# Altium PCB MOD-SH-RFDET-01.PcbDoc
Units mil, origin at the board's own origin, x right, y up, seen from the top; angles counter-clockwise.
Board outline 2204.72 x 393.7 mil, 2 copper layers (Top Layer, Bottom Layer), stack 61.855 mil thick; 41 components, 31 nets, 118 pads, 40 vias.
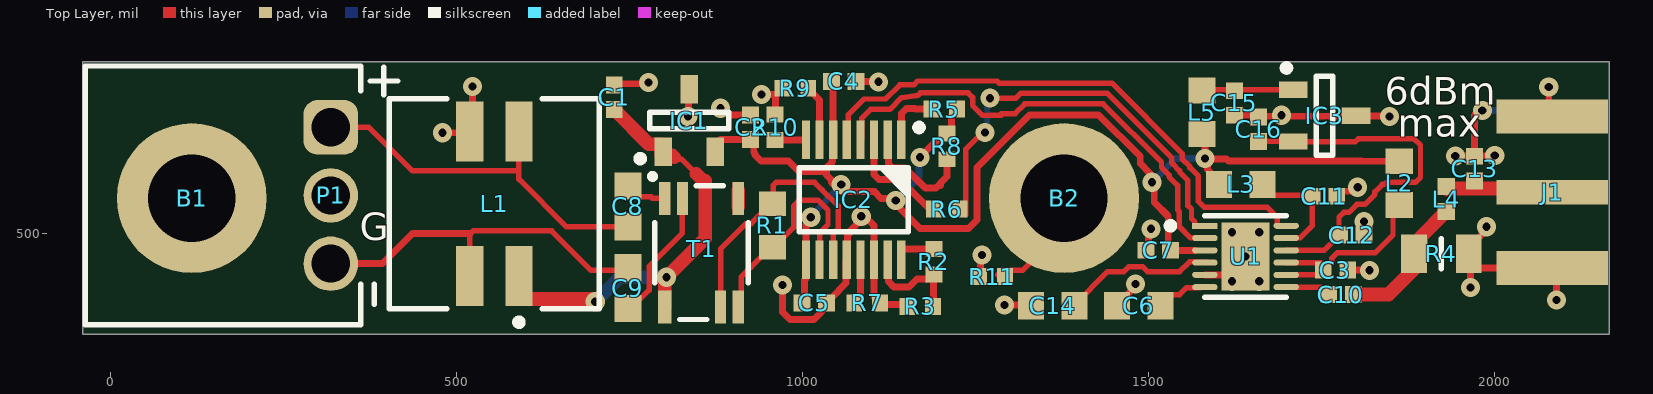
[diagram p0: Top Layer view]
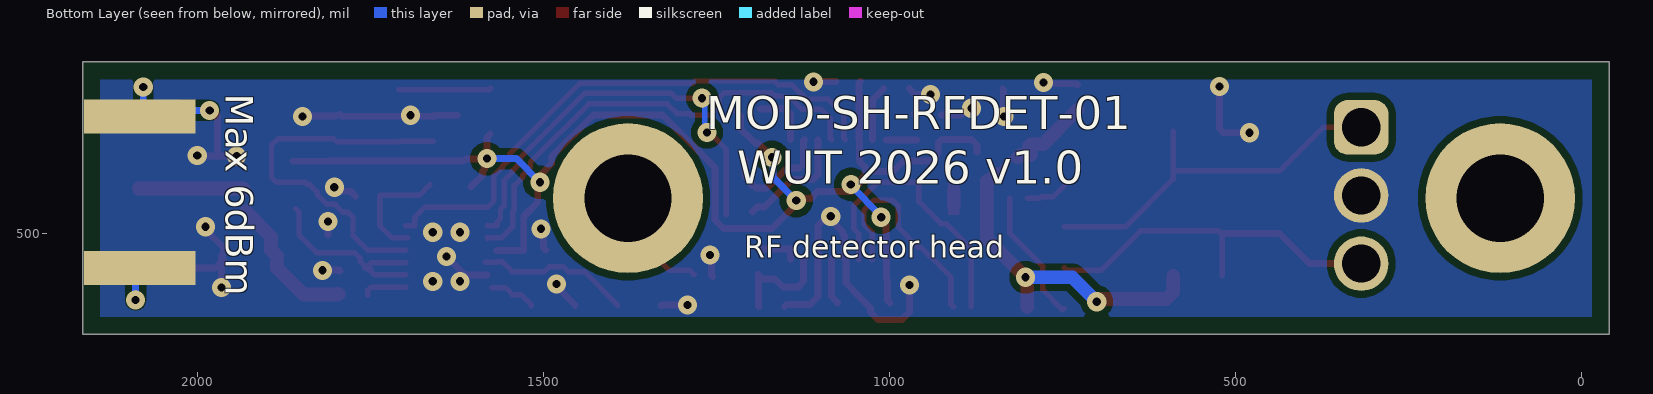
[diagram p1: Bottom Layer view, seen from below]
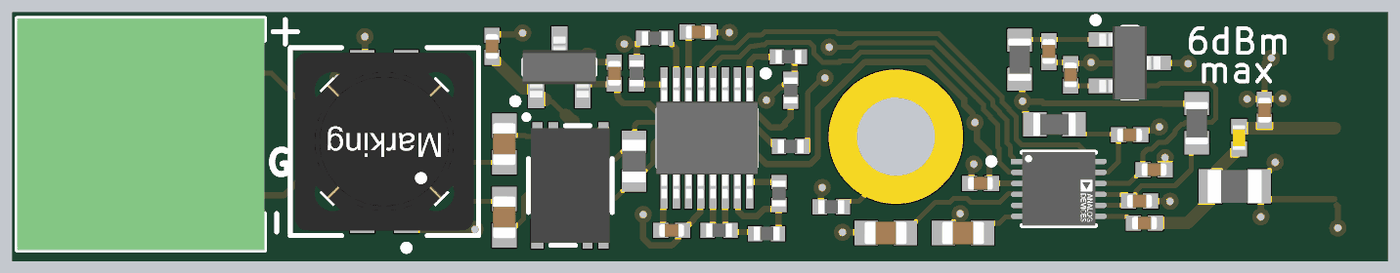
[diagram p2: 3D render of the assembled board from above, using the file's embedded part models]

## Layer stack, top to bottom
Top Solder: solder mask 0.4, Solder Resist, Dk 3.5
Top Layer: signal copper 1.4
Dielectric 2: core 59.0551, FR-4 High Tg, Dk 4.2
Bottom Layer: signal copper 1.4
Bottom Solder: solder mask 0.4, Solder Resist, Dk 3.5

## Board outline
-39.37,354.33 -39.37,748.03 2165.35,748.03 2165.35,354.33

## Design rules (kind name [scope] priority, off if disabled: settings)
AcuteAngle [All] p1: minimum=4.50000000000000E+0001 checktracksonly=FALSE
AssemblyTestPointUsage [All] p1: valid=2
BoardOutlineClearance BoardOutlineClearance_MountingHoles [OnCopper and InComponentClass('Mounting Holes')] p1: gap=39.37 ignorepadtopadclearanceinfootprint=FALSE
BoardOutlineClearance BoardOutlineClearance_Poly [OnCopper and IsPoly] p2: gap=25 ignorepadtopadclearanceinfootprint=FALSE
BoardOutlineClearance [OnCopper and Not InComponentClass('Logo') and not InComponentClass('FiducialMark') and not InRegion(1000,500,4000,800) and not InPoly] p3: gap=15 ignorepadtopadclearanceinfootprint=FALSE
Clearance Clearance_Keepouts [((IsTrack Or IsArc) And Not InPoly) And IsFree and IsKeepOut vs ((IsTrack Or IsArc) And Not InPoly) And IsFree and IsKeepOut] p1: gap=0 ignorepadtopadclearanceinfootprint=FALSE
Clearance Clearance_Poly [InPolygon] p2: gap=10 ignorepadtopadclearanceinfootprint=TRUE
Clearance Clearance_FiducialMark [IsKeepOut and InComponentClass('FiducialMark') vs IsPad and InComponentClass('FiducialMark')] p3: gap=0 ignorepadtopadclearanceinfootprint=TRUE
Clearance [All vs Not InComponentClass('FiducialMark')] p4: gap=5.8 ignorepadtopadclearanceinfootprint=FALSE
ComponentClearance ComponentClearance_MountingHoles_FiducialMarks [InComponentClass('Mounting Holes') vs InComponentClass('FiducialMark')] p1: gap=50 collisioncheckmode=3 verticalgap=10 showdistances=FALSE
ComponentClearance ComponentClearance_Shunt [InComponentClass('Header') vs InComponentClass('Shunt')] p2: gap=0 collisioncheckmode=3 verticalgap=0 showdistances=FALSE
ComponentClearance ComponentClearance_Logo [InComponentClass('Logo')] p3: gap=30 collisioncheckmode=3 verticalgap=10 showdistances=FALSE
ComponentClearance ComponentClearance_ScrewToNut [(HasFootprint('NY PMS 440 0025 PH')) vs (HasFootprint('Keystone_1902C'))] p4: gap=5 collisioncheckmode=3 verticalgap=10 showdistances=FALSE
ComponentClearance ComponentClearance_MountingHoles [InComponentClass('Mounting Holes')] p5: gap=100 collisioncheckmode=3 verticalgap=100000 showdistances=FALSE
ComponentClearance ComponentClearance_SmallPassives [HasFootprint('0201*') or HasFootprint('0402*') or HasFootprint('0508') or HasFootprint('0603*') or HasFootprint('0612') or HasFootprint('0805*') or HasFootprint('0815*') or HasFootprint('0830*') or HasFootprint('1206*') or HasFootprint('1210*') or HasFootprint('1808*') or HasFootprint('1812*') or HasFootprint('1825*') or HasFootprint('2010*') or HasFootprint('2220*') or HasFootprint('2225*') or HasFootprint('2512*') or HasFootprint('2728*') or HasFootprint('3518*') vs HasFootprint('0201*') or HasFootprint('0402*') or HasFootprint('0508') or HasFootprint('0603*') or HasFootprint('0612') or HasFootprint('0805*') or HasFootprint('0815*') or HasFootprint('0830*') or HasFootprint('1206*') or HasFootprint('1210*') or HasFootprint('1808*') or HasFootprint('1812*') or HasFootprint('1825*') or HasFootprint('2010*') or HasFootprint('2220*') or HasFootprint('2225*') or HasFootprint('2512*') or HasFootprint('2728*') or HasFootprint('3518*')] p6: gap=14.96 collisioncheckmode=3 verticalgap=10 showdistances=FALSE
ComponentClearance ComponentClearance_THtoSMT [IsThruComponent vs IsSMTComponent] p7: gap=15 collisioncheckmode=3 verticalgap=30 showdistances=FALSE
ComponentClearance ComponentClearance_THtoTH [IsThruComponent vs IsThruComponent] p8: gap=10 collisioncheckmode=3 verticalgap=30 showdistances=FALSE
ComponentClearance [All] p9: gap=-100 collisioncheckmode=3 verticalgap=10 showdistances=FALSE
DiffPairsRouting [All] p1: maxlimit=100 minlimit=10 mostfreqgap=10 toplayer_minwidth=15 toplayer_maxwidth=15 toplayer_prefwidth=15 bottomlayer_minwidth=15 bottomlayer_maxwidth=15 bottomlayer_prefwidth=15 maxuncoupledlength=1000
FabricationTestPointUsage TestPointUsage [All] p1: valid=2 allowmultiple=FALSE
FabricationTestpoint Testpoint [All] p1: side=3 testpointundercomponent=TRUE minsize=40 maxsize=100 preferedsize=60 minholesize=0 maxholesize=40 preferedholesize=32 testpointgrid=1 allowsidetop=TRUE allowsidebottom=TRUE usegrid=TRUE gridtolerance=0.01
FanoutControl Fanout_LCC [IsLCC] p1: bgadir=Out bgaviamode=Centered fanoutstyle=Auto fanoutdirection=Alternating viagrid=1 // Fanout_LCC (Default Rule)
FanoutControl Fanout_BGA [IsBGA] p2: bgadir=Out bgaviamode=Centered fanoutstyle=Auto fanoutdirection=Alternating viagrid=1 // Fanout_BGA (Default Rule)
FanoutControl Fanout_Default [All] p4: bgadir=Out bgaviamode=Centered fanoutstyle=Auto fanoutdirection=Alternating viagrid=1 // Fanout_Default (Default Rule)
FanoutControl Fanout_Small [(CompPinCount < 5)] p5: bgadir=Out bgaviamode=Centered fanoutstyle=Auto fanoutdirection=OutThenIn viagrid=1 // Fanout_Small (Default Rule)
HoleSize [All] p1: absolutevalues=TRUE maxlimit=251 minlimit=7.87 maxpercent=80.000 minpercent=20.000
MinimumAnnularRing MinimumAnnularRing_ThermalPadVias [IsVia and InAnyComponent] p1: minimumring=5
MinimumAnnularRing [All] p2: minimumring=5
MinimumSolderMaskSliver MinimumSolderMaskSliver_Logo [InComponentClass('Logo') vs InComponentClass('Logo')] p1: minsoldermaskwidth=0.7
MinimumSolderMaskSliver [All] p2: minsoldermaskwidth=3
PlaneConnect [All] p1: planeconnectstyle=Direct reliefexpansion=10 reliefentries=4 reliefconductorwidth=10 reliefairgap=10
PolygonConnect [All] p1: connectstyle=Direct reliefconductorwidth=10 reliefentries=4 polygonreliefangle="90 Angle" airgapwidth=10
RoutingVias [All] p1: holewidth=8 width=11.81 viastyle="Through Hole" minholewidth=11.81 minwidth=27.56 maxholewidth=40 maxwidth=65
SilkToBoardRegionClearance [Not ((IsComment or IsDesignator) And (Hide <> 'False')) and not InRegion(1000,500,4000,800)] p1:
SilkToSilkClearance SilkToSilkClearance_Pb-FreeLogo [(HasFootprint('Pb-Free_Overlay_Medium') OR HasFootprint('Pb-Free_Overlay_Small')) vs (HasFootprint('Pb-Free_Overlay_Medium') OR HasFootprint('Pb-Free_Overlay_Small'))] p1: silktosilkclearance=0
SilkToSilkClearance [All] p2: silktosilkclearance=3.94
SilkToSolderMaskClearance SilkToComponentPadClearance [(IsPad or IsFill or IsRegion) and InAnycomponent] p1: minsilkscreentomaskgap=3 clearancetoexposedcopper=TRUE
SilkToSolderMaskClearance "Silk to Solder Mask Opening" [All] p2: minsilkscreentomaskgap=3 clearancetoexposedcopper=FALSE
SolderMaskExpansion [All] p1: expansion=1.97 istentingtop=FALSE
SupplyNets "Schematic Supply Nets_2" [InNet('P3V3')] p1: voltage=0.000
SupplyNets "Schematic Supply Nets_12" [InNet('P5V0')] p2: voltage=0.000
SupplyNets "Schematic Supply Nets_11" [InNet('GND')] p3: voltage=0.000
UnRoutedNet [All] p1: checkbadconnections=TRUE
Width [All] p1: maxlimit=100 minlimit=7.87 preferedwidth=10 checkconnectedcopper=TRUE
14 further rules are at their usual default settings.

## Components (designator, comment, footprint, x,y, rotation, side; value= is the part's Value field where it differs from the comment)
B1 "Plated Hole" MTG320_550 118.11,551.18 r0 top
B2 "Plated Hole" MTG320_550 1377.95,551.18 r0 top locked
C1 "1uF" CAPC1005X55N 728.35,696.85 r270 top
C2 "1uF" CAPC1005X55N 925.2,653.54 r270 top
C3 "1uF" CAPC1005X55N 1769.97,447.36 r180 top
C4 "1uF" CAPC1005X55N 1060,720 r180 top
C5 "1uF" CAPC1005X55N 1017.28,400 r180 top
C6 "10nF" CAPC1608X87N 1486,396 r180 top
C7 "1uF" CAPC1005X55N 1514,476 r0 top
C8 "10uF" CAPC1608X80N 748.03,539.37 r90 top
C9 "10uF" CAPC1608X80N 748.03,421.26 r270 top
C10 "1nF" CAPC1005X55N 1777.84,411.93 r0 top
C11 "1uF" CAPC1005X55N 1754,554 r180 top
C12 "1uF" CAPC1005X55N 1793.28,498 r180 top
C13 "1.8pF" CAPC1005X55N 1971,594 r270 top
C14 "10nF" CAPC1608X87N 1361.5,396 r180 top
C15 "1uF" CAPC1005X55N 1624,688.72 r90 top
C16 "1uF" CAPC1005X55N 1659,651 r270 top
IC1 "AP7313-33SAG-7" SOT95P240X130-3N 836.61,663.39 r90 top
IC2 "LTC6820HMS" SOP50P490X110-16N 1074,549 r270 top
IC3 "REF3318AIDBZT" SOT95P237X112-3N 1754.28,670.4 r0 top
J1 "60312202114508" 60312202114508 2383.59,559.75 r90 top
L1 "100µH, 0.3A" WE-DD_7332 555.12,543.31 r180 top
L2 "220R@100MHz" INDC1608X95N 1862,573 r270 top
L3 "220R@100MHz" INDC1608X95N 1633,571 r0 top
L4 "1.5nH" IND_MURATA_LQP15MN_02 1930,549.89 r90 top
L5 "220R@100MHz" INDC1608X95N 1577,675.5 r90 top
P1 "691382010003" 691382010003 163.39,555.12 r270 top
R1 "120" RESC1608X55N 956.69,511.81 r270 top
R2 "2K87" RESC1005X40N 1190,459.5 r270 top
R3 "1k2" RESC1005X40N 1170,395 r180 top
R4 "68R1" RESC2012X60N 1923,471 r180 top
R5 "0" RESC1005X40N 1205,680 r0 top
R6 "0" RESC1005X40N 1208.66,535.43 r0 top
R7 "0" RESC1005X40N 1093.5,400 r180 top
R8 "1k2" RESC1005X40N 1208.66,625.98 r90 top
R9 "0" RESC1005X40N 990,710 r0 top
R10 "0" RESC1005X40N 960.63,653.54 r270 top
R11 "0" RESC1005X40N 1274,438 r180 top
T1 "74930030" 74930030 854.33,472.44 r270 top
U1 "LTC5587IDD#TRPBF" FP-DD-12-05-08-1725-IPC_A 1640.05,467.05 r0 top

## Footprints (in the part's own frame and the unit in brackets; to place one, negate y for a bottom-side part, rotate by r counter-clockwise, add the part's x,y. Pads: shape width x height; smd on the part's side, far side on the other; paste and mask are expansions set on the pad)
74930030 [mm] "Super Tiny Signal Transformer, body 4.7x3.22mm"
  rect 1.2x0.41 smd: 1(-1.99,-1.35) 2(-1.99,-0.7) 6(1.99,0.7) 7(1.99,1.35)
  rect 0.6x0.41 smd: 3(-2.29,1.35) 4(-1.69,1.35)
  rect 1.2x0.5 smd: 5(1.99,-1.35)
  Top Layer region: -1.39,1.555 -2.59,1.555 -2.59,1.145 -2.59,1.145 -1.39,1.145
  silkscreen extent -2.9,-1.9 2.45,1.71, body extent -2.35,-1.61 2.35,1.61, height 2.83
691382010003 [mm] "Horizontal PCB Header, pitch 2.5mm, 03p"
  rrect50% 2x2 hole 1.4: 1(-2.5,3.95)
  round 2 hole 1.4: 2(0,3.95) 3(2.5,3.95)
  silkscreen extent -4.75,-5.05 4.75,5.05, body extent -4.75,-5.05 4.75,5.05, height 8.15
60312202114508 [mm] "SMA PCB End Launch Jack Round  Post for 1.1mm PCB"
  rect 0.9x4.1 smd: 1(0,7.635)
  rect 1.25x4.1 smd: 2(-2.775,7.635) 3(2.775,7.635)
  rect 1.25x4.1 smd far side: 4(-2.775,7.635) 5(2.775,7.635)
  body extent -3.17,-3.93 3.17,9.4, height 3.57
CAPC1005X55N [mm] "Capacitor, Non-Polarized, Chip; 1.00mm L X 0.50mm W X 0.70mm H, IPC Medium Density"
  rect 0.62x0.62 smd: 1(-0.45,0) 2(0.45,0)
  body extent -0.52,-0.27 0.53,0.28, height 0.55
CAPC1608X80N [mm] "Chip Capacitor, Body 1.6x0.8mm IPC Medium Density"
  rect 1x1 smd: 1(-0.75,0) 2(0.75,0)
  body extent -0.87,-0.47 0.88,0.48, height 0.8
CAPC1608X87N [mm] "Chip Capacitor, Body 1.6x0.8mm IPC Medium Density"
  rect 0.95x1 smd: 1(-0.8,0) 2(0.8,0)
  body extent -0.87,-0.47 0.88,0.48, height 0.87
FP-DD-12-05-08-1725-IPC_A [mm]
  rect 0.931x0.222 smd paste+0 mask+0: 1(-1.491,1.125)
  rrect100% 0.931x0.222 smd paste+0 mask+0: 2(-1.491,0.675) 3(-1.491,0.225) 4(-1.491,-0.225) 5(-1.491,-0.675) 6(-1.491,-1.125) 7(1.491,-1.125) 8(1.491,-0.675) 9(1.491,-0.225) 10(1.491,0.225) 11(1.491,0.675) 12(1.491,1.125)
  rect 1.75x2.48 smd paste-1000 mask+0: 13(0,0)
  silkscreen extent -2.88,-1.5 1.5,1.5, body extent -2.46,-2 2.46,2, height 0.25
IND_MURATA_LQP15MN_02 [mm] "SMT inductor 0402, Body Width 0.50mm Body Lenght 1.00mm Height 0.45mm"
  rect 0.62x0.64 smd: 1(-0.46,0) 2(0.46,0)
  body extent -0.5,-0.25 0.5,0.25, height 0.45
INDC1608X95N [mm] "Chip Inductor, 2-Leads, EIA 0603, Metric 1608, Body 1.6x0.8mm, IPC Medium Density"
  rect 0.95x1 smd: 1(-0.8,0) 2(0.8,0)
  body extent -0.87,-0.47 0.88,0.48, height 0.95
MTG320_550 [mm] "Plated Through Hole: Hole Dia.=3.2mm Pad Dia.=5.5mm"
  round 5.5 hole 3.2: 1(0,0)
RESC1005X40N [mm] "Chip Resistor, EIA 0402, Metric 1005, Body 1.0x0.5mm, IPC Medium Density"
  rect 0.58x0.62 smd: 1(-0.47,0) 2(0.47,0)
  body extent -0.52,-0.27 0.53,0.28, height 0.4
RESC1608X55N [mm] "Chip Resistor, EIA 0603, Metric 1608, Body 1.6x0.8mm, IPC Medium Density"
  rect 0.9x1 smd: 1(-0.8,0) 2(0.8,0)
  body extent -0.87,-0.47 0.88,0.48, height 0.55
RESC2012X60N [mm] "Chip Resistor, EIA 0805, Metric 2012, Body 2.0x1.2mm, IPC Medium Density"
  rect 0.95x1.4 smd: 1(-1,0) 2(1,0)
  silkscreen extent 0,-0.55 0,0.55, body extent -1.1,-0.67 1.1,0.68, height 0.6
SOP50P490X110-16N [mm] "SOP, 0.50mm Pitch; 16 Pin, 3.00mm W X 4.039mm L X 1.10mm H Body, IPC Medium Density"
  rect 1.4x0.3 smd: 1(-2.2,1.75) 2(-2.2,1.25) 3(-2.2,0.75) 4(-2.2,0.25) 5(-2.2,-0.25) 6(-2.2,-0.75) 7(-2.2,-1.25) 8(-2.2,-1.75) 9(2.2,-1.75) 10(2.2,-1.25) 11(2.2,-0.75) 12(2.2,-0.25) 13(2.2,0.25) 14(2.2,0.75) 15(2.2,1.25) 16(2.2,1.75)
  silkscreen extent -2.77,-2 1.17,2.53, body extent -2.47,-2.07 2.47,2.07, height 1.1
SOT95P237X112-3N [mm] "SOT, 0.95mm, pitch; 3 pin,1.30mm W X 2.92mm L X 1.12mm H body, IPC Medium Density"
  rect 1.05x0.6 smd: 1(-1.15,0.95) 2(-1.15,-0.95) 3(1.15,0)
  silkscreen extent -1.52,-1.45 0.3,1.87, body extent -1.25,-1.5 1.25,1.5, height 1.1
SOT95P240X130-3N [mm] "SOT23 3-Leads, Pitch 0.95mm - Body 1.3x2.9mm, IPC Medium Density"
  rect 1.05x0.65 smd: 1(-1.15,0.95) 2(-1.15,-0.95) 3(1.15,0)
  silkscreen extent -1.52,-1.45 0.3,1.92, body extent -1.25,-1.5 1.25,1.5, height 1.3
WE-DD_7332 [mm] "SMT Shielded Coupled Inductor, 4-Leads, body"
  rect 1x2.2 smd: 1(-0.9,2.65) 2(-0.9,-2.65) 3(0.9,-2.65) 4(0.9,2.65)
  silkscreen extent -3.85,-3.85 3.85,4.47, body extent -3.65,-3.65 3.65,3.65, height 4.03

## Part data
B1 B2: library part PLATED_HOLE3.2_PAD5.5, "Single Terminal Socket", Author="CERN DEM JMW", Component Type="Standard (No BOM)", ComponentHeight=0mm, CreateDate=01.10.2012, Family="Plated Hole", HelpURL=Undefined, LatestRevisionDate=01.10.2012, Mounted=No, PackageDescription="Plated Through Hole: Hole Dia.=3.2mm Pad Dia.=5.5mm", Part Description="Plated Through Hole: Hole Dia.=3.2mm Pad Dia.=5.5mm", Part Number=PLATED_HOLE3.2_PAD5.5, Pin Count=1, Sense=No, SMD=No, Socket=No, Status=None
C1 C2 C3 C4 C5 C7 C11 C12 C15 C16: library part CC0402_1UF_16V_10%_X5R, "Non-polarised capacitor", Case=0402, Manufacturer=GENERIC, Manufacturer1 ComponentHeight=0.55mm, Manufacturer1 Example=TDK, Manufacturer1 Part Number=C1005X5R1C105KT, Tolerance=±10%, Voltage=16V, Author="CERN DEM JLC", Component Type=Standard, CreateDate=25.10.2012, HelpURL=\\cern.ch\dfs\Applications\Altium\Datasheets\CC0402_X5R_TDK_C.pdf, LatestRevisionDate=25.10.2012, Manufacturer Part Number=CC0402_1UF_16V_10%_X5R, Mounted=Yes, Part Description="SMD Multilayer Chip Ceramic Capacitor", Part Number=CC0402_1UF_16V_10%_X5R, Pin Count=2, Sense=No, SMD=Yes, Socket=No, Status=Preferred, TC=X5R
C6 C14: library part CC0603_10NF_50V_5%_C0G, "Non-polarised capacitor", Case=0603, Manufacturer=GENERIC, Manufacturer1 ComponentHeight=0.9mm, Manufacturer1 Example=TDK, Manufacturer1 Part Number=C1608C0G1H103J080, Tolerance=±5%, Voltage=50V, Author="CERN DEM JLC", Component Type=Standard, CreateDate=10.12.2014, HelpURL=\\cern.ch\dfs\Applications\Altium\Datasheets\CC0603_C0G_TDK_C.pdf, LatestRevisionDate=10.12.2014, Manufacturer Part Number=CC0603_10NF_50V_5%_C0G, Mounted=Yes, Part Description="SMD Multilayer Chip Ceramic Capacitor", Part Number=CC0603_10NF_50V_5%_C0G, Pin Count=2, Sense=No, SMD=Yes, Socket=No, Status=Preferred, TC=C0G/NP0
C8 C9: library part CC0603_10UF_16V_20%_X5R, "Non-polarised capacitor", Case=0603, Manufacturer=GENERIC, Manufacturer1 ComponentHeight=0.8mm, Manufacturer1 Example=MURATA, Manufacturer1 Part Number=GRM188R61C106MA73D, Tolerance=±20%, Voltage=16V, Author="CERN DEM MR", Component Type=Standard, CreateDate=02.03.2016, HelpURL=\\cern.ch\dfs\Applications\Altium\Datasheets\CC0603_X5R_MURATA_GRM.pdf, LatestRevisionDate=02.03.2016, Manufacturer Part Number=CC0603_10UF_16V_20%_X5R, Mounted=Yes, Part Description="SMD Multilayer Chip Ceramic Capacitor", Part Number=CC0603_10UF_16V_20%_X5R, Pin Count=2, Sense=No, SMD=Yes, Socket=No, Status=None, TC=X5R
C10: library part CC0402_1NF_50V_10%_X7R, "Non-polarised capacitor", Case=0402, Manufacturer=GENERIC, Manufacturer1 ComponentHeight=0.55mm, Manufacturer1 Example=PHYCOMP, Manufacturer1 Part Number=223858715623, Tolerance=±10%, Voltage=50V, Author="CERN DEM JLC", Component Type=Standard, CreateDate=03.12.2007, HelpURL=\\cern.ch\dfs\Applications\Altium\Datasheets\CC0402_X7R_PHYCOMP.pdf, LatestRevisionDate=03.12.2007, Manufacturer Part Number=CC0402_1NF_50V_10%_X7R, Mounted=Yes, Part Description="SMD Multilayer Chip Ceramic Capacitor", Part Number=CC0402_1NF_50V_10%_X7R, Pin Count=2, Sense=No, SMD=Yes, Socket=No, Status="Not Recommended", TC=X7R
C13: library part CC0402_1.8PF_50V_0.25PF_C0G, "Non-polarised capacitor", Case=0402, Manufacturer=GENERIC, Manufacturer1 ComponentHeight=0.55mm, Manufacturer1 Example=KEMET, Manufacturer1 Part Number=C0402C189C5GACTU, Tolerance=±0.25pF, Voltage=50V, Author="CERN DEM JLC", Component Type=Standard, CreateDate=04.10.2016, HelpURL="\\cern.ch\dfs\Applications\Altium\Datasheets\CC0402_C0G_KEMET_(Commercial Grade).pdf", LatestRevisionDate=04.10.2016, Manufacturer Part Number=CC0402_1.8PF_50V_0.25PF_C0G, Mounted=Yes, Part Description="SMD Multilayer Chip Ceramic Capacitor", Part Number=CC0402_1.8PF_50V_0.25PF_C0G, Pin Count=2, Sense=No, SMD=Yes, Socket=No, Status=Preferred, TC=C0G/NP0
IC1: "3-Terminal Regulator 1=IN 2=OUT 3=GND", Case=SOT23, Manufacturer="DIODES INCORPORATED", Author="CERN DEM JLC", Bonding=No, Component Type=Standard, ComponentHeight=1.35mm, CreateDate=20.03.2018, Device=AP7313-33SAG-7, HelpURL=\\cern.ch\dfs\Applications\Altium\Datasheets\AP7313-33SAG-7.pdf, LatestRevisionDate=20.03.2018, Manufacturer Part Number=AP7313-33SAG-7, Mounted=Yes, PackageDescription="SOT23 3-Leads, Pitch 0.95mm - Body 1.3x2.9mm, IPC Medium Density", Part Description="3.3V, 150mA Low Quiescent Current, Fast Transient Low Dropout Linear Regulator", Part Number=AP7313-33SAG-7, Pin Count=3, PressFit=No, Sense=No, SMD=Yes, Socket=No
IC2: "isoSPI Isolated Communications Interface", Case=MSOP16, Manufacturer="ANALOG DEVICES", Author="CERN DEM BC", Bonding=No, Component Type=Standard, ComponentHeight=1.1mm, CreateDate=09.04.2020, Device=LTC6820HMS, HelpURL=\\cern.ch\dfs\Applications\Altium\Datasheets\LTC6820HMS.pdf, LatestRevisionDate=09.04.2020, Manufacturer Part Number=LTC6820HMS, Mounted=Yes, PackageDescription="SOP, 0.50mm Pitch; 16 Pin, 3.00mm W X 4.039mm L X 1.10mm H body, IPC Medium Density", Part Description="isoSPI Isolated Communications Interface", Part Number=LTC6820HMS, Pin Count=16, PressFit=No, Sense=No, SMD=Yes, Socket=No
IC3: "3-Terminal Regulator 1=IN 2=OUT 3=GND", Case=SOT23-3, Manufacturer="TEXAS INSTRUMENTS", Author="CERN DEM JLC", Bonding=No, Component Type=Standard, ComponentHeight=1.12mm, CreateDate=20.06.2011, Device=REF3318AIDBZT, HelpURL=\\cern.ch\dfs\Applications\Altium\Datasheets\REF3318AIDBZT.pdf, LatestRevisionDate=20.06.2011, Manufacturer Part Number=REF3318AIDBZT, Mounted=Yes, PackageDescription="SOT, 0.95mm Pitch; 3 Pin, 1.30mm W X 2.92mm L X 1.12mm H body, IPC Medium Density", Part Description="1.8V, 30ppm/°C Drift, 3.9uA, Voltage Reference", Part Number=REF3318AIDBZT, Pin Count=3, PressFit=No, Sense=No, SMD=Yes, Socket=No
J1: "WR-SMA Connector, PCB End Launch Jack, 6.35SQ Flange Round Post for PCB 1.1mm, DC~18GHz, 50Ω", Frequency Range=DC~18GHz, Manufacturer="Wurth Elektronik", Max Operating Temperature=165°C, Min Operating Temperature=-65°C, Category="Coaxial Connector", Center Contact Diameter=0.76mm, ComponentLink1Description="Website Link", ComponentLink1URL=https://www.we-online.com/redexpert/article/60312202114508?ad, ComponentLink2Description="Datasheet Link", ComponentLink2URL=https://www.we-online.com/redexpert/spec/60312202114508?ad, Connector Type=SMA, Gender=Jack, Impedance=50Ω, Interface Type=MIL-STD-348, Manufacturer Part Number=60312202114508, Match Code=WR-SMA, Mount="Surface Mount", Orientation=Straight, Packaging=Tray
L1: library part 744878101, "WE-DD SMT Shielded Coupled Inductor, size 7332, 100µH, 0.3A, 1730mΩ", Case/Size Code=7332, DC Resistance 1=1400mΩ, DC Resistance Max 1=1730mΩ, Inductance 1=100µH, Manufacturer="Wurth Elektronik", Operating Temperature Max=125°C, Operating Temperature Min=-40°C, Rated Current 1=0.3A, Rated Voltage=80V, Saturation Current=0.7A, Self Resonant Frequency=4MHz, Category="Coupled Power Inductors", ComponentLink1Description="Website Link", ComponentLink1URL=https://www.we-online.com/redexpert/article/744878101?ad, ComponentLink2Description="Datasheet Link", ComponentLink2URL=https://www.we-online.com/redexpert/spec/744878101?ad, DC Resistance 2=1400mΩ, DC Resistance Max 2=1730mΩ, Height=4mm, Inductance 2=100µH, Length=7.3mm, Manufacturer Part Number=744878101, Match Code=WE-DD, Mount="Surface Mount", Packaging="Tape and Reel", Rated Current 2=0.3A, Turns Ratio=1:1, Type=Straight, Width=7.3mm
L2 L3 L5: library part IND0603_MURATA_BLM18SG221TN1, Case=0603, Manufacturer=MURATA, Manufacturer Part Number=BLM18SG221TN1, Power=2.5A, Resistance=0.04R, Tolerance=±25%, Author="CERN DEM MR", Component Type=Standard, ComponentHeight=0.95mm, CreateDate=08.01.2016, HelpURL=\\cern.ch\dfs\Applications\Altium\Datasheets\IND0603_MURATA_BLM18S.pdf, LatestRevisionDate=25.10.2018, Mounted=Yes, Part Description="SMD EMIFIL Suppression Chip Ferrite Bead", Part Number=IND0603_MURATA_BLM18SG221TN1, Pin Count=2, Sense=No, SMD=Yes, Socket=No
L4: library part IND0402_1.5NH_0.1NH_MURATA_LQP15MN1N5B02, "Inductor With Core", Case=0402, Manufacturer=MURATA, Manufacturer Part Number=LQP15MN1N5B02, Power=280mA, Resistance=0.20R, Tolerance=±0.1nH, Author="CERN DEM BC", Component Type=Standard, ComponentHeight=0.45mm, CreateDate=08.06.2021, HelpURL=\\cern.ch\dfs\Applications\Altium\Datasheets\IND_MURATA_LQP15MN1N5B02.pdf, LatestRevisionDate=08.06.2021, Mounted=Yes, Part Description="Film Type RF Inductor", Part Number=IND0402_1.5NH_0.1NH_MURATA_LQP15MN1N5B02, Pin Count=2, Sense=No, SMD=Yes, Socket=No
P1: "WR-TBL Series 382 Horizontal PCB Header, THT, pitch 2.5mm, 03p", Manufacturer="Wurth Elektronik", Max Operating Temperature=105°C, Min Operating Temperature=-40°C, Rated Current=12A, Working Voltage=300V, Application=Pluggable, Category="Terminal Block", ComponentLink1Description="Website Link", ComponentLink1URL=https://www.we-online.com/redexpert/article/691382010003?ad, ComponentLink2Description="Datasheet Link", ComponentLink2URL=https://www.we-online.com/redexpert/spec/691382010003?ad, Manufacturer Part Number=691382010003, Match Code=WR-TBL, Modularity=No, Mount="Through Hole", Number of Pins=3, Number of Rows=1, Orientation=Horizontal, Packaging=Box, Pitch=2.5mm, System="Pluggable Connector"
R1: library part R0603_120R_1%_0.1W_100PPM, "Resistor - 1%", Case=0603, Manufacturer=GENERIC, Manufacturer1 ComponentHeight=0.55mm, Manufacturer1 Example="NIC COMPONENT", Manufacturer1 Part Number=NRC06F1200TRF, Power=0.1W, Tolerance=±1%, Author="CERN DEM JLC", Component Type=Standard, CreateDate=03.12.2007, HelpURL=\\cern.ch\dfs\Applications\Altium\Datasheets\R0603_NIC_NRC.pdf, LatestRevisionDate=13.03.2008, Manufacturer Part Number=R0603_120R_1%_0.1W_100PPM, Mounted=Yes, Part Description="General Purpose Thick Film Chip Resistor", Part Number=R0603_120R_1%_0.1W_100PPM, Pin Count=2, PressFit=No, Sense=No, SMD=Yes, Socket=No, Status=Preferred, TC=±100ppm/°C
R2: library part R0402_2K87_1%_0.063W_100PPM, "Resistor - 1%", Case=0402, Manufacturer=GENERIC, Manufacturer1 ComponentHeight=0.4mm, Manufacturer1 Example=VISHAY, Manufacturer1 Part Number=CRCW04022K87FK, Power=0.063W, Tolerance=±1%, Author="CERN DEM BC", Component Type=Standard, CreateDate=08.02.2021, HelpURL="\\cern.ch\dfs\Applications\Altium\Datasheets\R0402_VISHAY_CRCW e3.pdf", LatestRevisionDate=08.02.2021, Manufacturer Part Number=R0402_2K87_1%_0.063W_100PPM, Mounted=Yes, Part Description="General Purpose Thick Film Chip Resistor", Part Number=R0402_2K87_1%_0.063W_100PPM, Pin Count=2, PressFit=No, Sense=No, SMD=Yes, Socket=No, Status=None, TC=±100ppm/°C
R3 R8: library part R0402_1K2_1%_0.0625W_100PPM, "Resistor - 1%", Case=0402, Manufacturer=GENERIC, Manufacturer1 ComponentHeight=0.4mm, Manufacturer1 Example="YAGEO PHYCOMP", Manufacturer1 Part Number=232270671202L, Power=0.0625W, Tolerance=±1%, Author="CERN DEM JLC", Component Type=Standard, CreateDate=03.12.2007, HelpURL=\\cern.ch\dfs\Applications\Altium\Datasheets\R0402_Phycomp_RC0402.pdf, LatestRevisionDate=17.10.2012, Manufacturer Part Number=R0402_1K2_1%_0.0625W_100PPM, Mounted=Yes, Part Description="General Purpose Thick Film Chip Resistor", Part Number=R0402_1K2_1%_0.0625W_100PPM, Pin Count=2, PressFit=No, Sense=No, SMD=Yes, Socket=No, Status="Not Recommended", TC=±100ppm/°C
R4: library part R0805_68R1_0.1%_0.1W_10PPM, "Resistor - 0.1%", Case=0805, Manufacturer=GENERIC, Manufacturer1 ComponentHeight=0.6mm, Manufacturer1 Example="TYCO HOLSWORTHY", Manufacturer1 Part Number=RN73C2A68R1BTG, Power=0.1W, Tolerance=±0.1%, Author="CERN DEM JLC", Component Type=Standard, CreateDate=03.12.2007, HelpURL=\\cern.ch\dfs\Applications\Altium\Datasheets\R0805_Tyco_RN73.pdf, LatestRevisionDate=13.03.2008, Manufacturer Part Number=R0805_68R1_0.1%_0.1W_10PPM, Mounted=Yes, Part Description="Thin Film Chip Resistor", Part Number=R0805_68R1_0.1%_0.1W_10PPM, Pin Count=2, PressFit=No, Sense=No, SMD=Yes, Socket=No, Status="Not Recommended", TC=±10ppm
R5 R6 R7 R9 R10 R11: library part R0402_0R_JUMPER, "Resistor", Case=0402, Manufacturer=GENERIC, Manufacturer1 ComponentHeight=0.4mm, Manufacturer1 Example="YAGEO PHYCOMP", Manufacturer1 Part Number=232270591001L, Author="CERN DEM JLC", Component Type=Standard, CreateDate=03.12.2007, HelpURL=\\cern.ch\dfs\Applications\Altium\Datasheets\R0402_Phycomp_RC0402.pdf, LatestRevisionDate=17.10.2012, Manufacturer Part Number=R0402_0R_JUMPER, Mounted=Yes, Part Description="1A (0.05R Max DC Resistance) Zero Ohm Jumper", Part Number=R0402_0R_JUMPER, Pin Count=2, PressFit=No, Sense=No, SMD=Yes, Socket=No, Status="Not Recommended"
T1: "WE-STST SMT Super Tiny Signal Transformer, size 4532, 1:1, 350uH", Case/Size Code=4532, Inductance=350uH, Insulation Test Voltage=1500Vrms, Manufacturer="Wurth Elektronik", Operating Temperature Max=105°C, Operating Temperature Min=-40°C, Application="Ethernet, PoE", Category="Signal Transformers", ComponentLink1Description="Website Link", ComponentLink1URL=https://www.we-online.com/redexpert/article/74930030?ad, ComponentLink2Description="Datasheet Link", ComponentLink2URL=https://www.we-online.com/redexpert/spec/74930030?ad, Data Rate=10/100/1GBase-T, Height=2.9mm, Length=4.7mm, Manufacturer Part Number=74930030, Match Code=WE-STST, Mount="Surface Mount", Packaging="Tape and Reel", Turns Ratio=1:1, Width=3.22mm
U1: library part CMP-09141-000103-1, "IC RF DETECT 10MHZ-6GHZ 12DFN", Case/Package="DFN EP", Frequency=10MHz, Operating Supply Current=3mA, Package Quantity=2500, Number of Pins=12, Packaging="Tape and Reel", RoHS Compliant=Yes

## Via types
v1: diameter 27.56, hole 11.81, Top Layer to Bottom Layer, tented both sides, 35 vias
v2: diameter 27.56, hole 11.81, Top Layer to Bottom Layer, 5 vias

## Nets (pads, with @x,y where several pads share a name; then routed paths per layer and width w, separated by ;. In a path a pad name is that pad's centre, name@x,y a point inside that pad or via, vN(x,y) a via of type N, cw(c..) or ccw(c..) an arc to the next point about the centre after c; other vN are vias at no path point)
CSn: IC2.5 U1.12 | length 810.1
  Top Layer w7.87: IC2.5 1066.13,637.58 1066.13,671.43 1089.14,694.45 1120.27,694.45 1140.82,715 1161.13,715 1166.6,720.47 1281.3,720.47 1284.29,717.48 1446.84,717.48 1548.59,615.72 1548.59,608 1559.75,596.85 1559.75,595.26 1571.78,583.23 1571.78,546.75 1580.53,538 1671.46,538 1685.52,523.94 1685.52,511.75 1685.93,511.34 U1.12
GND: C1.1 C2.1 C3.1 C4.1 C5.1 C6.2 C7.1 C11.1 C12.1 C13.1 C14.2 C15.1 C16.1 IC1.3 IC2.12 IC2.14 IC3.3 J1.2 J1.3 J1.4 J1.5 L1.3 P1.2 R3.2 R4.1 R7.1 R9.1 R10.1 R11.2 U1.5 U1.13 | length 1876.2
  Top Layer w10: v1(480.32,645.67) 517.72,645.67 L1.3 523.62,651.57 v1(523.62,712.6) ; C1.1 730.32,716.54 775.59,716.54 v1(777.56,718.5) ; v1(834.65,669.29) 835.63,670.28 835.63,707.68 IC1.3 ; v1(881.89,681.1) 886.64,681.1 896.48,671.26 C2.1 ; v1(940.94,700.79) R9.1@963.07,700.79 ; R10.1 R10.1@964.57,673.23 ; R10.1@961.2,678.92 961.2,698.92 971.5,709.21 R9.1 ; v1(971.47,425.73) 971.47,386.59 982.36,375.71 1016.78,375.71 1027.8,386.73 1027.8,392.8 1051.5,416.5 1052.75,417.75 1052.75,418.47 1063.25,428.97 1063.25,461.48 1065.06,463.29 1065.06,497.59 1067.99,500.51 1067.99,503.24 1085,520.25 v1(1085,525) 1090,525 1103.53,511.47 IC2.14 1103.53,409.27 1112.01,400.79 R7.1 1114.51,397.5 1149,397.5 R3.2 ; C4.1 1078.09,719.63 1109.63,719.63 v1(1110,719.25) ; R11.2 1257.46,439.97 1257.46,467.21 v1(1259.43,469.18) ; v1(1292,397) 1329.01,397 C14.2 ; C6.2 1454.5,396.98 1481.32,423.8 v1(1481.32,427.09) ; C7.1 1499.92,479.64 1499.92,503.64 v1(1503.28,507) ; U1.5 1613.47,440.47 v2(1640.05,467.05) ; C15.1 C16.1@1659,671 ; C16.1 1659.84,669.56 1791.56,669.56 IC3.3@1794,672 ; C11.1 1778.92,561.2 1791.45,561.2 1797.25,567 v1(1802,567) ; C3.1@1793.59,446.06 1794.71,447.18 1818.82,447.18 v1(1819,447) ; IC3.3 1800.25,669.7 1847.3,669.7 v1(1848,669) ; C12.1 v1(1811,517.39) ; v1(1943,612) 1943.14,611.86 1970.86,611.86 C13.1 ; R4.1@1962,463 1974.5,450.5 J1.2 ; v1(1965,422) 1965,468.37 R4.1 1962.37,479.86 1988,505.49 v1(1988,510) ; v1@1978,679 1978,678 1971,671 C13.1 ; v1(1982,678) 1985.11,678 v1@1986.11,679 ; v1@1986,677 v1@1986,678.89 ; v1(2000,613) 1999.36,612.36 1971.64,612.36 C13.1 ; v1@2075,706 2075.89,706 2078,703.89 J1.3@2078,679 ; J1.2@2087,441 2089,439 v1(2089,404)
  Bottom Layer w10: v1(1982,678) 2024,678 J1.5@2030,672 ; v1(2078,712) 2078,674 J1.5 ; J1.4 2089,444.5 v1(2089,404)
  other v1: 1692,671
  other v2: 1620.52,431.11 1659.89,431.11 1620.52,501.98 1659.89,501.98
IM: IC2.10 R1.2 T1.7 | length 317.1
  Top Layer w7.87: T1.7 911.42,398.03 911.42,437.4 925.68,451.66 926.07,451.66 954.72,480.31 R1.2 958.66,480.31 987.4,509.06 987.4,539.8 996.02,548.43 1022.48,548.43 1037.01,533.9 1037.01,513.35 1024.79,501.13 IC2.10
IP: IC2.11 R1.1 T1.6 | length 402.8
  Top Layer w7.87: T1.6 881.89,477.91 918.52,514.55 925.96,514.55 957.68,546.26 957.68,569.88 962.29,574.49 986.75,574.49 987.27,573.98 1017.69,573.98 1028.28,563.39 1028.68,563.39 1051.97,540.09 1051.97,507.15 1044.47,499.66 IC2.11
MISO: IC2.3 R6.1 | length 167.6
  Top Layer w10: IC2.3 1103.53,585.26 1110.88,577.91 1141.25,577.91 1180.46,538.7 1191.61,538.7 1198.03,532.28 R6.1@1198.03,531.5
MOSI: IC2.2 R8.1 | length 167.4
  Top Layer w10: IC2.2 1124.12,634.71 1124.12,600.88 1130,595 1148.33,595 1177.47,565.85 1193.02,565.85 1198.03,570.87 ; 1199.41,569.49 1199.41,573.03 1208.66,582.28 R8.1
N: C9.1 L1.4 P1.3 | length 534.9
  Top Layer w7.87: L1.4 519.68,499.32 524.3,503.94 637.8,503.94 694.88,446.85 744.09,446.85 C9.1
  Top Layer w10: P1.3 393.7,456.69 437.01,500 519.01,500 519.68,499.32
NetB2_1: B2.1 R11.1 | length 174.5
  Top Layer w7.87: R11.1@1282.39,440.39 1289.27,447.27 1318.57,447.27 1366.02,494.72 1377.95,494.72 B2.1
NetC3_2: C3.2 L2.2 U1.8 U1.9 | length 283
  Top Layer w7.87: U1.8 1743.98,440.47 1749,445.49 C3.2@1749,449 ; U1.9 1748.54,458.19 1756.73,450 C3.2@1758,450 ; C3.2 1764.46,459.57 1764.46,464.13 1772.49,472.17 1827.17,472.17 1853,498 1853,531 L2.2@1858,536
NetC6_1: C6.1 U1.6 | length 68.9
  Top Layer w7.87: C6.1 1517.5,396.98 1532.26,411.75 1544.75,411.75 1555,422 U1.6@1575,422
NetC8_2: C8.2 T1.1 | length 60.7
  Top Layer w7.87: C8.2 763.78,553.15 781.4,553.15 783.37,551.18 800.79,551.18 T1.1
NetC9_2: C9.2 T1.2 | length 195.6
  Top Layer w7.87: C9.2 750,389.76 778.74,418.5 778.74,452.85 826.77,500.89 T1.2
NetC10_1: C10.1 U1.7 | length 64.3
  Top Layer w7.87: U1.7 1749.3,422.76 1754,418.06 C10.1@1754,411
NetC10_2: C10.2 L4.1 R4.2 | length 196.4
  Top Layer w20: C10.2@1796,413 1797.07,411.93 1846.42,411.93 1884.63,450.14 R4.2@1884.63,459 ; R4.2@1885,468 1893.33,476.33 1893.33,495.5 1929.61,531.78 L4.1
NetC11_2: C11.2 L3.2 U1.11 | length 169.5
  Top Layer w7.87: L3.2 1664.5,570.02 1679.26,555.25 C11.2@1736.75,555.25 ; U1.11@1696,494 1719,494 1736.28,511.28 C11.2
NetC13_2: C13.2 J1.1 L4.2 | length 152.4
  Top Layer w20: L4.2@1932,564 1933,565 J1.1@2084,565
NetC14_1: C14.1 U1.4 | length 223.9
  Top Layer w7.87: C14.1 1393,396.98 1441.02,445 1464.15,445 1471.05,451.9 1491.6,451.9 1498.5,445 1545,445 1559.23,459.23 1566.14,459.23 1567.01,458.36 1583.76,458.36 U1.4@1584,458.6
NetC15_2: C15.2 IC3.1 L5.2 | length 133.9
  Top Layer w7.87: L5.2@1576,710 1578.2,707.8 IC3.1
NetIC2_1: IC2.1 R5.1 | length 84.4
  Top Layer w10: IC2.1 1142.9,673.25 1150.1,680.46 1162.9,680.46 1163.35,680 R5.1
NetIC2_7: IC2.7 R9.2 | length 81.1
  Top Layer w10: R9.2 1008.5,709.21 1024.79,692.93 IC2.7
NetIC2_8: IC2.8 R10.2 | length 44.7
  Top Layer w10: R10.2 1004.53,635.04 IC2.8
NetIC2_13: IC2.13 R7.2 | length 66
  Top Layer w10: R7.2 1075,400.79 1083.84,409.63 IC2.13
NetIC2_15: IC2.15 R2.2 R3.1 | length 155.5
  Top Layer w10: IC2.15 1124.12,461.48 1124.12,430.61 1131.99,422.74 1153.81,422.74 1165.64,434.57 1183.58,434.57 R2.2 1189.25,440.24 1189.25,395.75 R3.1
NetIC2_16: IC2.16 R2.1 | length 62.2
  Top Layer w10: IC2.16 1142.9,477.09 1143.8,478 R2.1
NetR6_2: R6.2 U1.1 | length 614.9
  Top Layer w7.87: R6.2@1236.22,527.56 1236.22,622.05 1260.24,646.06 v1(1263.78,646.06) ; v1(1270.75,695.67) 1308.42,695.67 1315.27,702.52 1440.64,702.52 1533.63,609.52 1533.63,601.81 1544.78,590.66 1544.78,589.06 1556.82,577.03 1556.82,540.55 1562,535.37 1562,521.61 1566.97,516.63 1566.97,511.78 1567.42,511.34 U1.1
  Bottom Layer w7.87: v1(1263.78,646.06) 1267.26,649.55 1267.26,692.18 v1(1270.75,695.67)
NetT1_3: T1.3 T1.4 | length 23.6
  Top Layer w19.68: T1.4 T1.3
P: C8.1 L1.2 P1.1 | length 552.7
  Top Layer w7.87: P1.1 374.02,653.54 437.01,590.55 590.55,590.55 ; L1.2 590.55,590.55 ; C8.1 659.45,509.84 590.55,578.74 590.55,590.55
P3V3: C2.2 C4.2 C5.2 C7.2 IC1.2 IC2.6 IC2.9 L2.1 L3.1 L5.1 R5.2 R8.2 U1.3 | length 2002.9
  Top Layer w10: IC1.2 874.02,628.03 881.81,635.83 C2.2 929.71,631.32 929.71,617.57 931.35,615.94 931.35,613.65 940,605 980,605 995,590 1035,590 ; C5.2 1003.28,403.72 1003.28,433.2 1004.2,434.12 1004.2,461.48 IC2.9 1005.1,512.16 1012.2,519.26 v1(1012.2,523.62) ; C4.2 1044.47,717.81 IC2.6 1043.57,634.71 1043.57,605.54 1042.78,604.75 1042.78,603.05 1035,595.27 1035,590 ; v1(1056.07,571.07) 1055.87,570.87 v1@1055.87,560.66 ; v1(1169.67,610.24) 1190.42,630.98 1194.37,630.98 1207.87,644.49 R8.2@1209.45,644.49 ; R8.2@1208.78,644.49 1215.2,650.91 1215.2,670.91 1224.41,680.12 R5.2@1224.41,681.1 ; v1@1504,574 1508.15,569.85 1508.15,545.41 1528.43,525.12 1528.43,478.57 C7.2@1530,477 ; v1(1505.02,574.18) 1501.66,577.54 1501.66,587.91 1488.02,601.55 1488.02,611.32 1427.81,671.54 1328.1,671.54 1252.24,595.68 1252.24,519.8 1239.65,507.2 1169.96,507.2 1142.53,534.64 1142.53,535.3 1134.88,542.94 v1(1134.88,547.7) 1131.52,551.06 1113.8,551.06 1104.2,560.66 v1@1055.87,560.66 ; C7.2@1528.43,476 1528.48,475.95 U1.3@1568.04,475.95 ; v1@1577,606 1579.38,606 1585.02,600.36 1585.02,592.65 1587.8,589.86 1587.8,584.2 L3.1@1605,567 ; L5.1 1581.66,639.35 v1(1581.66,608.47) ; v1@1581.66,608 1612.49,608 1615.49,605 1808.07,605 1808.58,604.5 L2.1 ; 1035,590 1035,584.75 1042.3,577.46 1042.3,574.23 v1@1055.87,560.66
  Bottom Layer w10: v1(1012.2,523.62) 1012.2,525.41 1056.07,569.28 v1(1056.07,571.07) ; v1(1134.88,547.7) 1134.88,548.06 1168.28,581.46 1168.28,608.85 v1(1169.67,610.24) ; v1(1505.02,574.18) 1539.21,608.37 1581.56,608.37 v1(1581.66,608.47)
P5V0: C1.2 IC1.1 L1.1 T1.5 | length 652.3
  Top Layer w7.87: 812.83,607.28 825.91,607.28 846.78,586.42
  Top Layer w19.68: L1.1 590.55,415.35 600.39,405.51 694.72,405.51 698.66,401.57 v1(700.79,401.57) ; C1.2 778.54,628.94 796.26,628.94 799.21,625.98 IC1.1 ; IC1.1@797.24,620.08 796.26,619.09 796.26,613.19 812.01,613.19 814.96,610.24 ; T1.5 801.18,432.51 803.54,434.88 v1(803.54,437.01) 859.57,493.03 859.57,559.06 859.57,576.57 ; 846.78,586.42 859.57,573.62
  Bottom Layer w19.68: v1(700.79,401.57) 736.22,437.01 v1(803.54,437.01)
SCK: IC2.4 U1.2 | length 687.6
  Top Layer w7.87: IC2.4 1085.81,637.58 1085.81,666.95 1098.35,679.49 1126.47,679.49 1143.46,696.48 1163.02,699.4 cw(c1164.18,691.61) 1164.18,699.48 1166.77,699.48 1170.51,703.23 1239.49,703.23 1245.94,696.77 1245.94,685.4 1260.47,670.87 1287.4,670.87 ; 1287.4,673.23 1307.13,673.23 1321.46,687.56 1434.44,687.56 1518.67,603.33 1518.67,595.61 1529.82,584.46 1529.82,581.78 1541.86,569.75 1541.86,534.36 1544.46,531.76 1544.46,509.95 1560.61,493.79 1581.2,493.79 U1.2
VREF_1V8: C12.2 C16.2 IC3.2 U1.10 | length 535
  Top Layer w7.87: C16.2 IC3.2@1709,633.28 ; U1.10 1743.98,475.91 ; IC3.2 1798.87,633 1802.87,637 1883.47,637 1892.71,627.76 1892.71,581.23 1885.48,574 1844,574 1841.23,571.23 1837.75,571.23 1826.8,560.28 1826.8,556.73 1812.27,542.2 1800.73,542.2 1789.3,530.77 1782,530.77 1775,523.77 C12.2@1775,504 ; 1744,476 1753.57,476 C12.2
pads on no net: B1.1

## Polygon pours and split planes (outlines as drawn)
GND on Bottom Layer "BOTTOM_LAYER_GND_P000" (solid, pour order 0): -27.56,738.19 2155,738.19 2155,364.17 -27.56,364.17

## Keep-outs
Keep-Out Layer:
  text ".Layer_Name" at 577,-858.49 h60

## Silkscreen, mask and mechanical layers (free items; w line width, h text height)
Top Overlay:
  lines w7.87: 375.98,720.47 415.35,720.47 ; 381.89,397.64 381.89,427.17 ; 395.67,700.79 395.67,740.16
  text "6dBm" at 1841,686 h40
  text "max" at 1860,640 h40
  text "G" at 360.39,490.32 h39.37
Bottom Overlay:
  text "Max 6dBm" at 1959,702 h40 r90
  text "MOD-SH-RFDET-01" at 1265,651 h47.24
  text "WUT 2026 v1.0" at 1220,572 h47.24
  text "RF detector head" at 1210,465 h31.5
Bottom Paste:
  text ".Layer_Name" at 577,-858.49 h60
Bottom Solder:
  text ".Layer_Name" at 577,-858.49 h60
Drill Guide:
  text ".Layer_Name" at 577,-858.49 h60
M1 Board Outline:
  the board outline again, w7.87
M2 Board Dimensions:
  rectangle: 0,-275 125,-150
  rectangle: 125,-400 500,-275
  lines w7: 0,-275 1000,-275 ; 125,-400 125,-150 ; 250,-400 250,-150 ; 500,-400 500,-150 ; 750,-400 750,-150 ; 0,-400 1000,-400 1000,-150 0,-150 0,-400
  text ".Layer_Name" at 577,-858.49 h60
M3 3D STEP Top:
  text ".Layer_Name" at 577,-858.49 h60
M4 3D STEP Bottom:
  text ".Layer_Name" at 577,-858.49 h60
M6 Assembly Bottom:
  lines w10: -292.5,-727.33 6309.5,-727.33 ; -290.5,-930.67 6309.5,-930.67 ; 1115.5,-1140.5 1115.5,-937.67 ; 1737.5,-727.33 1737.5,-524 ; 2577.5,-727.33 2577.5,-524 ; 3844.5,-1134 3844.5,-524 ; 4733.5,-1134 6309,-1134 6309,-524 -292.5,-524 -292.5,-1134 2304.5,-1134 6309.5,-1134 6309.5,-524
  text "COMPONENTS MARKED 'DNP' SHOULD NOT BE POPULATED." at 6102,-318 h60
  text ".VariantName" at 5058,-434 h60
  text "ASSEMBLY VARIANT:" at 6097,-434 h60
  text ".VersionControl_RevNumber" at 1035.5,-656.17 h60
  text "SVN REV:" at 1541.5,-656.17 h60
  text ".PCB_Rev" at 2088,-656.17 h60
  text "REV:" at 2379.5,-656.17 h60
  text ".PRJ_Number" at 3224,-656.17 h60
  text "BOARD #:" at 3769.5,-656.17 h60
  text "PCB VIEWED FROM BOTTOM SIDE" at 6246,-656.17 h60
  text ".TID" at 3224,-859.5 h60
  text "TID #:" at 3769.5,-859.5 h60
  text "TEXAS INSTRUMENTS" at 904.5,-1064.84 h60
  text ".Print_Time" at 2169,-1064.84 h60
  text ".Print_Date" at 2898,-1064.84 h60
  text "GENERATED    :" at 3767.5,-1064.84 h60
  text ".plot_File_Name" at 5440.5,-1064.84 h60
  text "PLOT NAME =" at 6246,-1064.84 h60
M14 Component Bodies Bottom:
  text ".Layer_Name" at 577,-858.49 h60
M15 Courtyards Top:
  text ".Layer_Name" at 577,-858.49 h60
M16 Courtyards Bottom:
  text ".Layer_Name" at 577,-858.49 h60
Drill Drawing:
  circle w10: c5363.72,3257.64 r27.63
  lines w10: 5336.09,3354.34 5391.34,3354.34 5391.34,3409.59 5336.09,3409.59 5336.09,3354.34 ; 5336.09,3533.91 5391.34,3533.91 5363.72,3478.66 5336.09,3533.91
  lines w12: 5286,3192.72 8517.49,3192.72 ; 5286,3565.68 8517.49,3565.68 ; 5623.86,3068.4 5623.86,3690 ; 5955.86,3068.4 5955.86,3690 ; 6592.43,3068.4 6592.43,3690 ; 6851.57,3068.4 6851.57,3690 ; 7226.72,3068.4 7226.72,3690 ; 7951.05,3068.4 7951.05,3690 ; 5286,3068.4 8517.49,3068.4 8517.49,3690 5286,3690 5286,3068.4
  text "Symbol" at 5360.59,3602.98 h72
  text "Quantity" at 5661.16,3602.98 h72
  text "Finished Hole Size" at 5993.16,3602.98 h72
  text "Plated" at 6629.72,3602.98 h72
  text "Hole Type" at 6888.86,3602.98 h72
  text "Drill Layer Pair" at 7264.02,3602.98 h72
  text "Hole Tolerance" at 7988.35,3602.98 h72
  text "40" at 5661.16,3478.66 h60
  text "11.81mil (0.300mm)" at 5993.16,3478.66 h60
  text "PTH" at 6629.72,3478.66 h60
  text "Round" at 6888.86,3478.66 h60
  text "Top Layer - Bottom Layer" at 7264.02,3478.66 h60
  text "3" at 5661.16,3354.34 h60
  text "55.12mil (1.400mm)" at 5993.16,3354.34 h60
  text "PTH" at 6629.72,3354.34 h60
  text "Round" at 6888.86,3354.34 h60
  text "Top Layer - Bottom Layer" at 7264.02,3354.34 h60
  text "2" at 5661.16,3230.02 h60
  text "125.98mil (3.200mm)" at 5993.16,3230.02 h60
  text "PTH" at 6629.72,3230.02 h60
  text "Round" at 6888.86,3230.02 h60
  text "Top Layer - Bottom Layer" at 7264.02,3230.02 h60
  text "45 Total" at 5661.16,3105.7 h60
  text ".Layer_Name" at 577,-858.49 h60

## Dimensions
0,-400 to 1000,-400 on M2 Board Dimensions
0,0 to 2165.35,354.33 on M2 Board Dimensions
0,0 to -39.37,748.03 on M2 Board Dimensions

## Text inside footprints (layer, text, board x,y; h text height)
J1: Assembly Notes "PCB Thickness 1.1mm" at 2571.19,425.89 h31.5 r90; Assembly Notes "PCB End" at 2193.24,500.69 h31.5 r90